# EAGLE board rgbsaber_periph1_v1.6_panel (EAGLE 5.10)
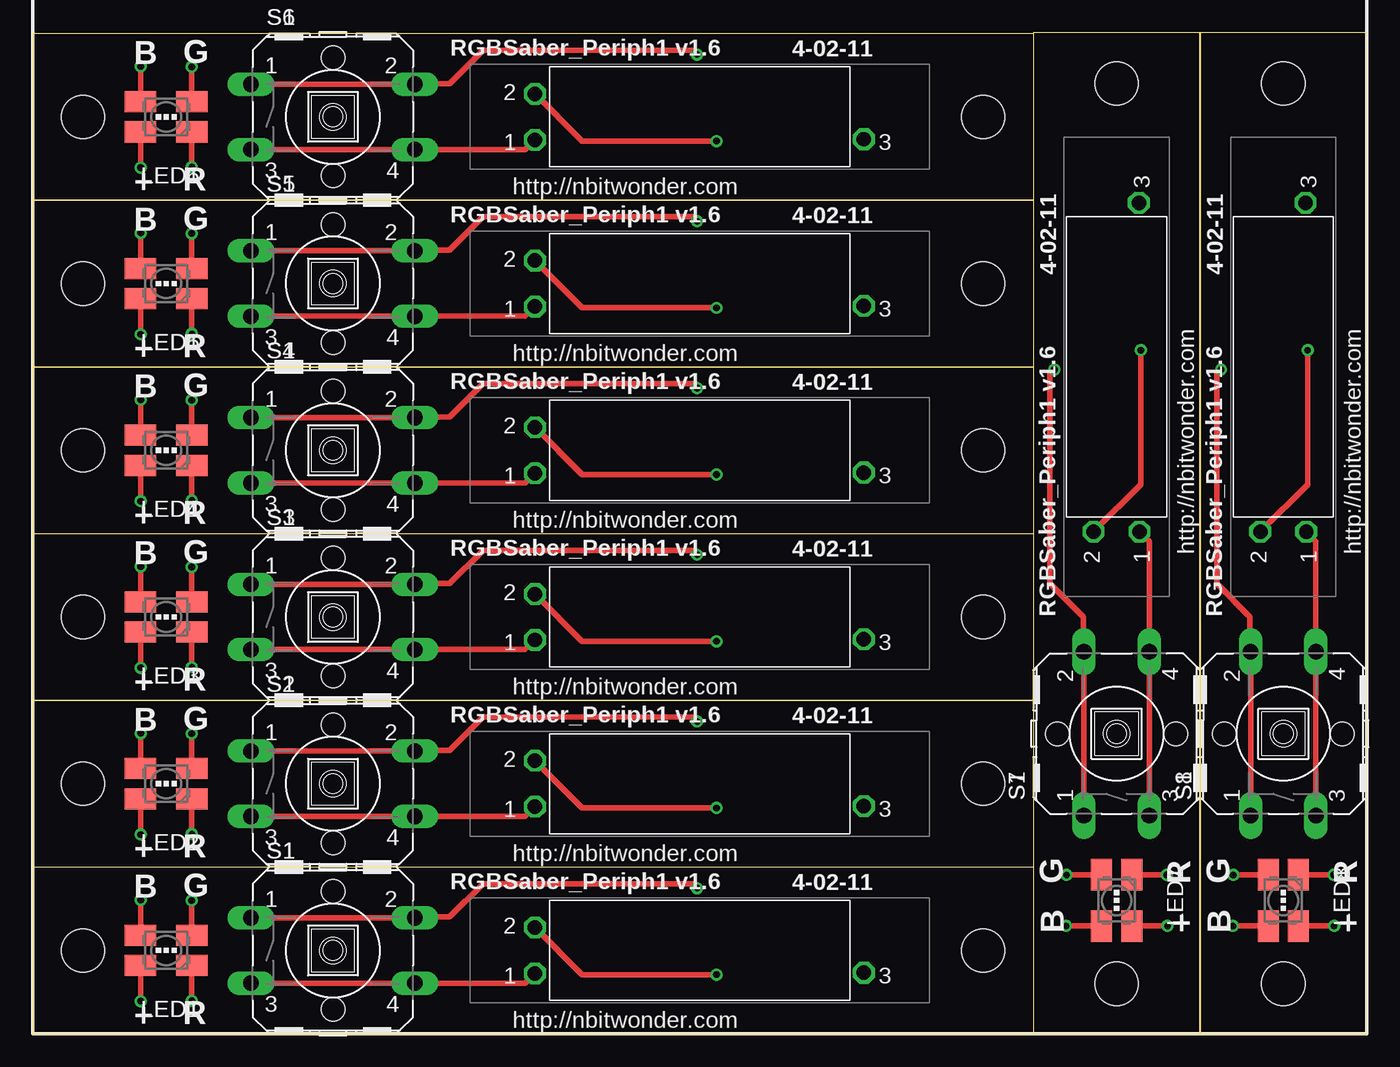
[diagram p0: board, top side]
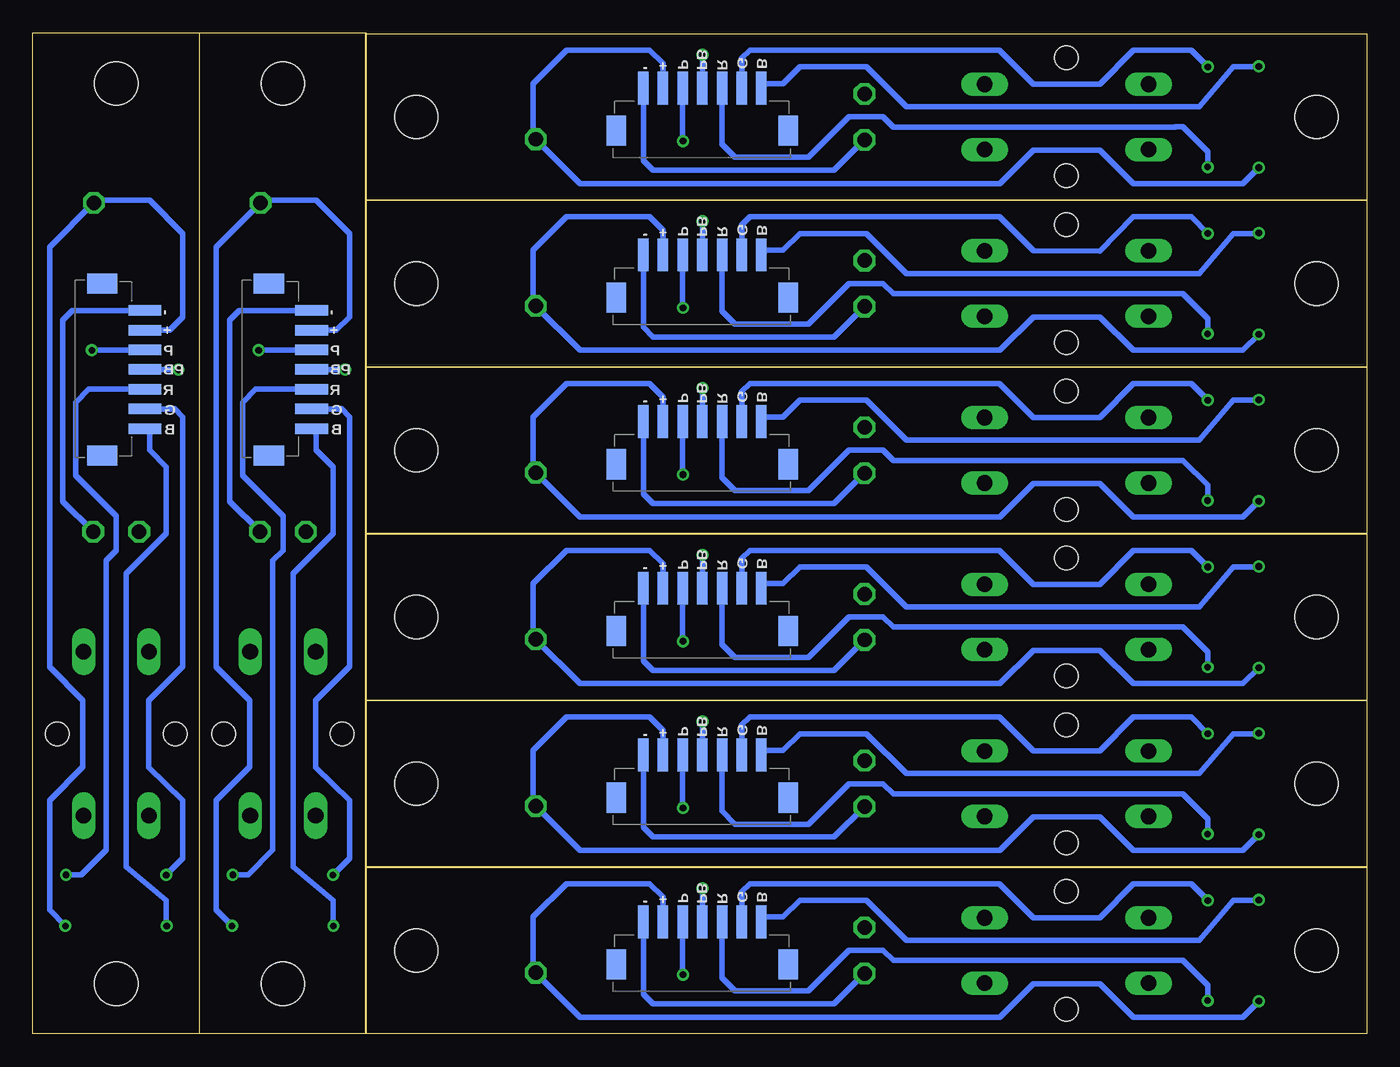
[diagram p1: board, bottom side, seen from below]

Size 101.6 x 76.25 mm. Coordinates in mm from the lower left corner, seen from the top.
Outline: 0,0 76.25,0 76.25,12.69 0,12.69 0,0
Outline: 0,12.7 76.25,12.7 76.25,25.39 0,25.39 0,12.7
Outline: 0,25.4 76.25,25.4 76.25,38.09 0,38.09 0,25.4
Outline: 0,38.1 76.25,38.1 76.25,50.79 0,50.79 0,38.1
Outline: 0,50.8 76.25,50.8 76.25,63.49 0,63.49 0,50.8
Outline: 0,63.5 76.25,63.5 76.25,76.19 0,76.19 0,63.5
Outline: 88.9,0 88.9,76.25 76.21,76.25 76.21,0 88.9,0
Outline: 101.6,0 101.6,76.25 88.91,76.25 88.91,0 101.6,0
Copper layers (1*16): Top 0.035mm / dielectric 1.5mm / Bottom 0.035mm
Design rules "default": minimum track width 10mil, minimum drill 24mil, track to track 8mil, track to pad 8mil, pad to pad 8mil, via to via 8mil, smd to smd 8mil, copper to edge 40mil, drill to drill 8mil, minimum pad ring 10mil, minimum via ring 8mil, stop-mask expansion 4mil, vias tented up to drill 0mil, thermal gap 10mil

## Footprints (pad centres in the part's own frame; a part is rotated, then mirrored left to right if it is on the bottom)
SLIDER-CUSTOM = drill 1.1 octagon: P$1 -12.5,1.7; P$2 12.55,1.75; P$3 12.55,-1.75
JST_ZH_SM4_TE_7 = smd 0.8 x 2.5: 1 -4.5,-3; 2 -3,-3; 3 -1.5,-3; 4 0,-3; 5 1.5,-3; 6 3,-3; 7 4.5,-3 | smd 1.5 x 2.3: NC0 -6.55,0.25; NC1 6.55,0.25
PLCC4 = smd 1.6 x 2.4: A -1.15,1.95; C@1 -1.15,-1.95; C@3 1.15,1.95; C@4 1.15,-1.95
B3F-40XX = drill 1.194 long: 1 -6.248,2.489; 2 6.248,2.489; 3 -6.248,-2.489; 4 6.248,-2.489 | hole 1.803: 0,-4.496; 0,4.496
STAND-OFF = hole 3.302: 0,0

## Placement (x,y rotation side)
ADJUST  SLIDERV1  [SLIDER-CUSTOM]  50.8,6.35 180 top
ADJUST1  SLIDERV1  [SLIDER-CUSTOM]  50.8,19.05 180 top
ADJUST2  SLIDERV1  [SLIDER-CUSTOM]  50.8,31.75 180 top
ADJUST3  SLIDERV1  [SLIDER-CUSTOM]  50.8,44.45 180 top
ADJUST4  SLIDERV1  [SLIDER-CUSTOM]  50.8,57.15 180 top
ADJUST5  SLIDERV1  [SLIDER-CUSTOM]  50.8,69.85 180 top
ADJUST6  SLIDERV1  [SLIDER-CUSTOM]  82.55,50.8 270 top
ADJUST7  SLIDERV1  [SLIDER-CUSTOM]  95.25,50.8 270 top
JST_SMD1  1X07_JST  [JST_ZH_SM4_TE_7]  50.6,5.54 180 bottom
JST_SMD2  1X07_JST  [JST_ZH_SM4_TE_7]  50.6,18.23 180 bottom
JST_SMD3  1X07_JST  [JST_ZH_SM4_TE_7]  50.6,30.93 180 bottom
JST_SMD4  1X07_JST  [JST_ZH_SM4_TE_7]  50.6,43.63 180 bottom
JST_SMD5  1X07_JST  [JST_ZH_SM4_TE_7]  50.6,56.34 180 bottom
JST_SMD6  1X07_JST  [JST_ZH_SM4_TE_7]  50.6,69.03 180 bottom
JST_SMD7  1X07_JST  [JST_ZH_SM4_TE_7]  83.36,50.6 90 bottom
JST_SMD8  1X07_JST  [JST_ZH_SM4_TE_7]  96.06,50.6 90 bottom
LED1  [PLCC4]  10.16,6.35 90 top
LED2  [PLCC4]  10.16,19.05 90 top
LED3  [PLCC4]  10.16,31.75 90 top
LED4  [PLCC4]  10.16,44.45 90 top
LED5  [PLCC4]  10.16,57.15 90 top
LED6  [PLCC4]  10.16,69.85 90 top
LED7  [PLCC4]  82.55,10.16 180 top
LED8  [PLCC4]  95.25,10.16 180 top
S1  [B3F-40XX]  22.86,6.35 0 top
S2  [B3F-40XX]  22.86,19.05 0 top
S3  [B3F-40XX]  22.86,31.75 0 top
S4  [B3F-40XX]  22.86,44.45 0 top
S5  [B3F-40XX]  22.86,57.15 0 top
S6  [B3F-40XX]  22.86,69.85 0 top
S7  [B3F-40XX]  82.55,22.86 90 top
S8  [B3F-40XX]  95.25,22.86 90 top
U$1  [STAND-OFF]  3.81,19.05 0 top
U$2  [STAND-OFF]  72.39,19.05 90 top
U$3  [STAND-OFF]  3.81,31.75 0 top
U$4  [STAND-OFF]  72.39,31.75 90 top
U$5  [STAND-OFF]  3.81,6.35 0 top
U$6  [STAND-OFF]  72.39,6.35 90 top
U$7  [STAND-OFF]  3.81,44.45 0 top
U$8  [STAND-OFF]  72.39,44.45 90 top
U$9  [STAND-OFF]  3.81,57.15 0 top
U$10  [STAND-OFF]  72.39,57.15 90 top
U$11  [STAND-OFF]  3.81,69.85 0 top
U$12  [STAND-OFF]  72.39,69.85 90 top
U$13  [STAND-OFF]  82.55,3.81 90 top
U$14  [STAND-OFF]  82.55,72.39 180 top
U$15  [STAND-OFF]  95.25,3.81 90 top
U$16  [STAND-OFF]  95.25,72.39 180 top

## Library data of the parts
ADJUST ADJUST1-ADJUST7 = purduecer
JST_SMD1-JST_SMD8 LED1-LED8 = NBitWonder
S1-S8 = switch-omron
U$1-U$16 = SparkFun

## Nets
BLUE: JST_SMD1.1 LED1.C@3
BLUE1: JST_SMD2.1 LED2.C@3
BLUE2: JST_SMD3.1 LED3.C@3
BLUE3: JST_SMD4.1 LED4.C@3
BLUE4: JST_SMD5.1 LED5.C@3
BLUE5: JST_SMD6.1 LED6.C@3
BLUE6: JST_SMD7.1 LED7.C@3
BLUE7: JST_SMD8.1 LED8.C@3
GREEN: JST_SMD1.2 LED1.C@4
GREEN1: JST_SMD2.2 LED2.C@4
GREEN2: JST_SMD3.2 LED3.C@4
GREEN3: JST_SMD4.2 LED4.C@4
GREEN4: JST_SMD5.2 LED5.C@4
GREEN5: JST_SMD6.2 LED6.C@4
GREEN6: JST_SMD7.2 LED7.C@4
GREEN7: JST_SMD8.2 LED8.C@4
PB_0: JST_SMD1.4 S1.1 S1.2
PB_1: JST_SMD2.4 S2.1 S2.2
PB_2: JST_SMD3.4 S3.1 S3.2
PB_3: JST_SMD4.4 S4.1 S4.2
PB_4: JST_SMD5.4 S5.1 S5.2
PB_5: JST_SMD6.4 S6.1 S6.2
PB_6: JST_SMD7.4 S7.1 S7.2
PB_7: JST_SMD8.4 S8.1 S8.2
PWR: ADJUST.P$1 JST_SMD1.6 LED1.A
PWR1: ADJUST1.P$1 JST_SMD2.6 LED2.A
PWR2: ADJUST2.P$1 JST_SMD3.6 LED3.A
PWR3: ADJUST3.P$1 JST_SMD4.6 LED4.A
PWR4: ADJUST4.P$1 JST_SMD5.6 LED5.A
PWR5: ADJUST5.P$1 JST_SMD6.6 LED6.A
PWR6: ADJUST6.P$1 JST_SMD7.6 LED7.A
PWR7: ADJUST7.P$1 JST_SMD8.6 LED8.A
RED: JST_SMD1.3 LED1.C@1
RED1: JST_SMD2.3 LED2.C@1
RED2: JST_SMD3.3 LED3.C@1
RED3: JST_SMD4.3 LED4.C@1
RED4: JST_SMD5.3 LED5.C@1
RED5: JST_SMD6.3 LED6.C@1
RED6: JST_SMD7.3 LED7.C@1
RED7: JST_SMD8.3 LED8.C@1
SLIDE: ADJUST.P$3 JST_SMD1.5
SLIDE1: ADJUST1.P$3 JST_SMD2.5
SLIDE2: ADJUST2.P$3 JST_SMD3.5
SLIDE3: ADJUST3.P$3 JST_SMD4.5
SLIDE4: ADJUST4.P$3 JST_SMD5.5
SLIDE5: ADJUST5.P$3 JST_SMD6.5
SLIDE6: ADJUST6.P$3 JST_SMD7.5
SLIDE7: ADJUST7.P$3 JST_SMD8.5
VSS: ADJUST.P$2 JST_SMD1.7 S1.3 S1.4
VSS1: ADJUST1.P$2 JST_SMD2.7 S2.3 S2.4
VSS2: ADJUST2.P$2 JST_SMD3.7 S3.3 S3.4
VSS3: ADJUST3.P$2 JST_SMD4.7 S4.3 S4.4
VSS4: ADJUST4.P$2 JST_SMD5.7 S5.3 S5.4
VSS5: ADJUST5.P$2 JST_SMD6.7 S6.3 S6.4
VSS6: ADJUST6.P$2 JST_SMD7.7 S7.3 S7.4
VSS7: ADJUST7.P$2 JST_SMD8.7 S8.3 S8.4

## Tracks (layer width: path | path; a pad name or v marks a point on that pad's centre or on a via)
BLUE  (via drill 0.5)
  Top 0.406: v8.21,10.2 LED1.C@3
  Bottom 0.406: JST_SMD1.1 45.74,8.89 44.45,8.89 43.18,10.16 38.1,10.16 35.06,7.12 12.73,7.12 10.16,10.16 8.25,10.16 v8.21,10.2
BLUE1  (via drill 0.5)
  Top 0.406: v8.21,22.89 LED2.C@3
  Bottom 0.406: JST_SMD2.1 45.74,21.59 44.45,21.59 43.18,22.86 38.1,22.86 35.06,19.82 12.73,19.82 10.16,22.86 8.25,22.86 v8.21,22.89
BLUE2  (via drill 0.5)
  Top 0.406: v8.21,35.59 LED3.C@3
  Bottom 0.406: JST_SMD3.1 45.74,34.29 44.45,34.29 43.18,35.56 38.1,35.56 35.06,32.52 12.73,32.52 10.16,35.56 8.25,35.56 v8.21,35.59
BLUE3  (via drill 0.5)
  Top 0.406: v8.21,48.3 LED4.C@3
  Bottom 0.406: JST_SMD4.1 45.74,46.99 44.45,46.99 43.18,48.26 38.1,48.26 35.06,45.22 12.73,45.22 10.16,48.26 8.25,48.26 v8.21,48.3
BLUE4  (via drill 0.5)
  Top 0.406: v8.21,60.99 LED5.C@3
  Bottom 0.406: JST_SMD5.1 45.74,59.69 44.45,59.69 43.18,60.96 38.1,60.96 35.06,57.92 12.73,57.92 10.16,60.96 8.25,60.96 v8.21,60.99
BLUE5  (via drill 0.5)
  Top 0.406: v8.21,73.69 LED6.C@3
  Bottom 0.406: JST_SMD6.1 45.74,72.39 44.45,72.39 43.18,73.66 38.1,73.66 35.06,70.62 12.73,70.62 10.16,73.66 8.25,73.66 v8.21,73.69
BLUE6  (via drill 0.5)
  Top 0.406: v78.7,8.21 LED7.C@3
  Bottom 0.406: JST_SMD7.1 80.01,45.74 80.01,44.45 78.74,43.18 78.74,38.1 81.78,35.06 81.78,12.73 78.74,10.16 78.74,8.25 v78.7,8.21
BLUE7  (via drill 0.5)
  Top 0.406: v91.41,8.21 LED8.C@3
  Bottom 0.406: JST_SMD8.1 92.71,45.74 92.71,44.45 91.44,43.18 91.44,38.1 94.48,35.06 94.48,12.73 91.44,10.16 91.44,8.25 v91.41,8.21
GREEN  (via drill 0.5)
  Top 0.406: v12.1,10.16 LED1.C@4
  Bottom 0.406: JST_SMD1.2 47.6,10.8 47.61,10.81 46.99,11.43 27.99,11.43 25.4,8.84 20.31,8.84 17.78,11.43 13.37,11.43 v12.1,10.16
GREEN1  (via drill 0.5)
  Top 0.406: v12.1,22.86 LED2.C@4
  Bottom 0.406: JST_SMD2.2 47.6,23.5 47.61,23.51 46.99,24.13 27.99,24.13 25.4,21.54 20.31,21.54 17.78,24.13 13.37,24.13 v12.1,22.86
GREEN2  (via drill 0.5)
  Top 0.406: v12.1,35.56 LED3.C@4
  Bottom 0.406: JST_SMD3.2 47.6,36.2 47.61,36.21 46.99,36.83 27.99,36.83 25.4,34.24 20.31,34.23 17.78,36.83 13.37,36.83 v12.1,35.56
GREEN3  (via drill 0.5)
  Top 0.406: v12.1,48.26 LED4.C@4
  Bottom 0.406: JST_SMD4.2 47.6,48.9 47.61,48.91 46.99,49.53 27.99,49.53 25.4,46.94 20.31,46.94 17.78,49.53 13.37,49.53 v12.1,48.26
GREEN4  (via drill 0.5)
  Top 0.406: v12.1,60.96 LED5.C@4
  Bottom 0.406: JST_SMD5.2 47.6,61.6 47.61,61.61 46.99,62.23 27.99,62.23 25.4,59.64 20.31,59.63 17.78,62.23 13.37,62.23 v12.1,60.96
GREEN5  (via drill 0.5)
  Top 0.406: v12.1,73.66 LED6.C@4
  Bottom 0.406: JST_SMD6.2 47.6,74.3 47.61,74.31 46.99,74.93 27.99,74.93 25.4,72.34 20.31,72.33 17.78,74.93 13.37,74.93 v12.1,73.66
GREEN6  (via drill 0.5)
  Top 0.406: v78.74,12.1 LED7.C@4
  Bottom 0.406: JST_SMD7.2 78.1,47.6 78.09,47.61 77.47,46.99 77.47,27.99 80.06,25.4 80.06,20.31 77.47,17.78 77.47,13.37 v78.74,12.1
GREEN7  (via drill 0.5)
  Top 0.406: v91.44,12.1 LED8.C@4
  Bottom 0.406: JST_SMD8.2 90.8,47.6 90.79,47.61 90.17,46.99 90.17,27.99 92.76,25.4 92.77,20.31 90.17,17.78 90.17,13.37 v91.44,12.1
PB_0  (via drill 0.5)
  Top 0.406: S1.1 S1.2 29.16,8.89 31.75,8.89 34.29,11.43 50.26,11.43 v50.59,11.09
  Bottom 0.406: v50.59,11.09 JST_SMD1.4
PB_1  (via drill 0.5)
  Top 0.406: S2.1 S2.2 29.16,21.59 31.75,21.59 34.29,24.13 50.26,24.13 v50.59,23.79
  Bottom 0.406: v50.59,23.79 JST_SMD2.4
PB_2  (via drill 0.5)
  Top 0.406: S3.1 S3.2 29.16,34.29 31.75,34.29 34.29,36.83 50.26,36.83 v50.59,36.49
  Bottom 0.406: v50.59,36.49 JST_SMD3.4
PB_3  (via drill 0.5)
  Top 0.406: S4.1 S4.2 29.16,46.99 31.75,46.99 34.29,49.53 50.26,49.53 v50.59,49.19
  Bottom 0.406: v50.59,49.19 JST_SMD4.4
PB_4  (via drill 0.5)
  Top 0.406: S5.1 S5.2 29.16,59.69 31.75,59.69 34.29,62.23 50.26,62.23 v50.59,61.89
  Bottom 0.406: v50.59,61.89 JST_SMD5.4
PB_5  (via drill 0.5)
  Top 0.406: S6.1 S6.2 29.16,72.39 31.75,72.39 34.29,74.93 50.26,74.93 v50.59,74.59
  Bottom 0.406: v50.59,74.59 JST_SMD6.4
PB_6  (via drill 0.5)
  Top 0.406: S7.1 S7.2 80.01,29.16 80.01,31.75 77.47,34.29 77.47,50.26 v77.81,50.59
  Bottom 0.406: v77.81,50.59 JST_SMD7.4
PB_7  (via drill 0.5)
  Top 0.406: S8.1 S8.2 92.71,29.16 92.71,31.75 90.17,34.29 90.17,50.26 v90.51,50.59
  Bottom 0.406: v90.51,50.59 JST_SMD8.4
PWR  (via drill 0.5)
  Top 0.406: v8.21,2.48 LED1.A
  Bottom 0.406: 53.6,7.88 JST_SMD1.6 53.6,10.42 54.61,11.43 60.96,11.43 63.5,8.89 63.5,4.85 ADJUST.P$1 59.92,1.27 27.94,1.27 25.4,3.81 20.32,3.81 17.78,1.27 9.43,1.27 v8.21,2.48
PWR1  (via drill 0.5)
  Top 0.406: v8.21,15.18 LED2.A
  Bottom 0.406: 53.6,20.58 JST_SMD2.6 53.6,23.12 54.61,24.13 60.96,24.13 63.5,21.59 63.5,17.55 ADJUST1.P$1 59.92,13.97 27.94,13.97 25.4,16.51 20.32,16.51 17.78,13.97 9.43,13.97 v8.21,15.18
PWR2  (via drill 0.5)
  Top 0.406: v8.21,27.88 LED3.A
  Bottom 0.406: 53.6,33.28 JST_SMD3.6 53.6,35.82 54.61,36.83 60.96,36.83 63.5,34.29 63.5,30.25 ADJUST2.P$1 59.92,26.67 27.94,26.67 25.4,29.21 20.32,29.21 17.78,26.67 9.43,26.67 v8.21,27.88
PWR3  (via drill 0.5)
  Top 0.406: v8.21,40.58 LED4.A
  Bottom 0.406: 53.6,45.98 JST_SMD4.6 53.6,48.52 54.61,49.53 60.96,49.53 63.5,46.99 63.5,42.95 ADJUST3.P$1 59.92,39.37 27.94,39.37 25.4,41.91 20.32,41.91 17.78,39.37 9.43,39.37 v8.21,40.58
PWR4  (via drill 0.5)
  Top 0.406: v8.21,53.28 LED5.A
  Bottom 0.406: 53.6,58.68 JST_SMD5.6 53.6,61.22 54.61,62.23 60.96,62.23 63.5,59.69 63.5,55.65 ADJUST4.P$1 59.92,52.07 27.94,52.07 25.4,54.61 20.32,54.61 17.78,52.07 9.43,52.07 v8.21,53.28
PWR5  (via drill 0.5)
  Top 0.406: v8.21,65.98 LED6.A
  Bottom 0.406: 53.6,71.38 JST_SMD6.6 53.6,73.92 54.61,74.93 60.96,74.93 63.5,72.39 63.5,68.35 ADJUST5.P$1 59.92,64.77 27.94,64.77 25.4,67.31 20.32,67.31 17.78,64.77 9.43,64.77 v8.21,65.98
PWR6  (via drill 0.5)
  Top 0.406: v86.42,8.21 LED7.A
  Bottom 0.406: 81.02,53.6 JST_SMD7.6 78.48,53.6 77.47,54.61 77.47,60.96 80.01,63.5 84.05,63.5 ADJUST6.P$1 87.63,59.92 87.63,27.94 85.09,25.4 85.09,20.32 87.63,17.78 87.63,9.43 v86.42,8.21
PWR7  (via drill 0.5)
  Top 0.406: v99.12,8.21 LED8.A
  Bottom 0.406: 93.72,53.6 JST_SMD8.6 91.18,53.6 90.17,54.61 90.17,60.96 92.71,63.5 96.75,63.5 ADJUST7.P$1 100.33,59.92 100.33,27.94 97.79,25.4 97.79,20.32 100.33,17.78 100.33,9.43 v99.12,8.21
RED  (via drill 0.5)
  Top 0.406: v12.11,2.52 LED1.C@1
  Bottom 0.406: JST_SMD1.3 49.1,4.26 48.1,3.27 42.52,3.27 39.43,6.35 36.83,6.35 36.06,5.58 14.59,5.58 14.58,5.58 14.01,5.58 12.11,3.69 v12.11,2.52
RED1  (via drill 0.5)
  Top 0.406: v12.11,15.22 LED2.C@1
  Bottom 0.406: JST_SMD2.3 49.1,16.96 48.1,15.96 42.52,15.96 39.43,19.05 36.83,19.05 36.06,18.28 14.59,18.28 14.58,18.29 14.01,18.29 12.11,16.39 v12.11,15.22
RED2  (via drill 0.5)
  Top 0.406: v12.11,27.93 LED3.C@1
  Bottom 0.406: JST_SMD3.3 49.1,29.66 48.1,28.66 42.52,28.66 39.43,31.75 36.83,31.75 36.06,30.98 14.59,30.98 14.58,30.98 14.01,30.98 12.11,29.09 v12.11,27.93
RED3  (via drill 0.5)
  Top 0.406: v12.11,40.62 LED4.C@1
  Bottom 0.406: JST_SMD4.3 49.1,42.37 48.1,41.37 42.52,41.37 39.43,44.45 36.83,44.45 36.06,43.68 14.59,43.68 14.58,43.69 14.01,43.69 12.11,41.78 v12.11,40.62
RED4  (via drill 0.5)
  Top 0.406: v12.11,53.33 LED5.C@1
  Bottom 0.406: JST_SMD5.3 49.1,55.06 48.1,54.06 42.52,54.06 39.43,57.15 36.83,57.15 36.06,56.38 14.59,56.38 14.58,56.38 14.01,56.38 12.11,54.48 v12.11,53.33
RED5  (via drill 0.5)
  Top 0.406: v12.11,66.03 LED6.C@1
  Bottom 0.406: JST_SMD6.3 49.1,67.77 48.1,66.77 42.52,66.77 39.43,69.85 36.83,69.85 36.06,69.08 14.59,69.08 14.58,69.08 14.01,69.08 12.11,67.19 v12.11,66.03
RED6  (via drill 0.5)
  Top 0.406: v86.38,12.11 LED7.C@1
  Bottom 0.406: JST_SMD7.3 84.64,49.1 85.64,48.1 85.64,42.52 82.55,39.43 82.55,36.83 83.32,36.06 83.32,14.59 83.31,14.58 83.31,14.01 85.22,12.11 v86.38,12.11
RED7  (via drill 0.5)
  Top 0.406: v99.08,12.11 LED8.C@1
  Bottom 0.406: JST_SMD8.3 97.33,49.1 98.33,48.1 98.33,42.52 95.25,39.43 95.25,36.83 96.02,36.06 96.02,14.59 96.02,14.58 96.02,14.01 97.92,12.11 v99.08,12.11
SLIDE  (via drill 0.5)
  Top 0.406: v52.08,4.5 41.85,4.5 ADJUST.P$3
  Bottom 0.406: JST_SMD1.5 52.1,4.53 v52.08,4.5
SLIDE1  (via drill 0.5)
  Top 0.406: v52.08,17.2 41.85,17.2 ADJUST1.P$3
  Bottom 0.406: JST_SMD2.5 52.1,17.23 v52.08,17.2
SLIDE2  (via drill 0.5)
  Top 0.406: v52.08,29.9 41.85,29.9 ADJUST2.P$3
  Bottom 0.406: JST_SMD3.5 52.1,29.93 v52.08,29.9
SLIDE3  (via drill 0.5)
  Top 0.406: v52.08,42.6 41.85,42.6 ADJUST3.P$3
  Bottom 0.406: JST_SMD4.5 52.1,42.62 v52.08,42.6
SLIDE4  (via drill 0.5)
  Top 0.406: v52.08,55.3 41.85,55.3 ADJUST4.P$3
  Bottom 0.406: JST_SMD5.5 52.1,55.33 v52.08,55.3
SLIDE5  (via drill 0.5)
  Top 0.406: v52.08,68 41.85,68 ADJUST5.P$3
  Bottom 0.406: JST_SMD6.5 52.1,68.03 v52.08,68
SLIDE6  (via drill 0.5)
  Top 0.406: v84.4,52.08 84.4,41.85 ADJUST6.P$3
  Bottom 0.406: JST_SMD7.5 84.38,52.1 v84.4,52.08
SLIDE7  (via drill 0.5)
  Top 0.406: v97.1,52.08 97.1,41.85 ADJUST7.P$3
  Bottom 0.406: JST_SMD8.5 97.08,52.1 v97.1,52.08
VSS
  Top 0.406: S1.3 S1.4 37.51,3.86 ADJUST.P$2
  Bottom 0.406: JST_SMD1.7 55.1,3.02 54.37,2.29 40.56,2.29 ADJUST.P$2
VSS1
  Top 0.406: S2.3 S2.4 37.51,16.56 ADJUST1.P$2
  Bottom 0.406: JST_SMD2.7 55.1,15.71 54.37,14.98 40.56,14.98 ADJUST1.P$2
VSS2
  Top 0.406: S3.3 S3.4 37.51,29.26 ADJUST2.P$2
  Bottom 0.406: JST_SMD3.7 55.1,28.41 54.37,27.68 40.56,27.68 ADJUST2.P$2
VSS3
  Top 0.406: S4.3 S4.4 37.51,41.96 ADJUST3.P$2
  Bottom 0.406: JST_SMD4.7 55.1,41.12 54.37,40.38 40.56,40.38 ADJUST3.P$2
VSS4
  Top 0.406: S5.3 S5.4 37.51,54.66 ADJUST4.P$2
  Bottom 0.406: JST_SMD5.7 55.1,53.81 54.37,53.09 40.56,53.09 ADJUST4.P$2
VSS5
  Top 0.406: S6.3 S6.4 37.51,67.36 ADJUST5.P$2
  Bottom 0.406: JST_SMD6.7 55.1,66.52 54.37,65.78 40.56,65.78 ADJUST5.P$2
VSS6
  Top 0.406: S7.3 S7.4 85.04,37.51 ADJUST6.P$2
  Bottom 0.406: JST_SMD7.7 85.89,55.1 86.61,54.37 86.61,40.56 ADJUST6.P$2
VSS7
  Top 0.406: S8.3 S8.4 97.74,37.51 ADJUST7.P$2
  Bottom 0.406: JST_SMD8.7 98.58,55.1 99.31,54.37 99.31,40.56 ADJUST7.P$2

## Text on the board
tPlace: B | G | RGBSaber_Periph1 v1.6 | 4-02-11 | + | R | http://nbitwonder.com | RGBSaber_Periph1 v1.6 | 4-02-11 | B | G | 4-02-11 | 4-02-11 | R | + | http://nbitwonder.com | G | RGBSaber_Periph1 v1.6 | 4-02-11 | B | + | R | http://nbitwonder.com | http://nbitwonder.com | http://nbitwonder.com | B | G | RGBSaber_Periph1 v1.6 | 4-02-11 | RGBSaber_Periph1 v1.6 | RGBSaber_Periph1 v1.6 | + | R | http://nbitwonder.com | RGBSaber_Periph1 v1.6 | 4-02-11 | B | G | + | R | http://nbitwonder.com | RGBSaber_Periph1 v1.6 | 4-02-11 | G | R | G | R | B | G | B | + | B | + | + | R | http://nbitwonder.com
bPlace: B | G | R | PB | P | + | - | B | G | R | PB | P | + | - | - | - | + | + | P | P | PB | PB | R | R | B | G | R | PB | P | + | - | G | G | B | B | B | G | R | PB | P | + | - | B | G | R | PB | P | + | - | B | G | R | PB | P | + | -
_tNames: S1 | LED1 | S1 | LED1 | S1 | LED1 | S1 | LED1 | S1 | S1 | S1 | LED1 | S1 | LED1 | LED1 | LED1